# EAGLE board CT_schematic (EAGLE 7.6.0)

Size 100 x 80 mm. Coordinates in mm from the lower left corner, seen from the top.
Outline: 0,0 100,0 100,80 0,80 0,0
Copper layers (1*16): Top 0.035mm / dielectric 1.5mm / Bottom 0.035mm
Design rules "default": minimum track width 10mil, minimum drill 24mil, track to track 8mil, track to pad 8mil, pad to pad 8mil, via to via 8mil, smd to smd 8mil, copper to edge 40mil, drill to drill 8mil, minimum pad ring 10mil, minimum via ring 8mil, stop-mask expansion 4mil, vias tented up to drill 0mil, thermal gap 10mil

## Footprints (pad centres in the part's own frame; a part is rotated, then mirrored left to right if it is on the bottom)
C0603 = smd 0.8 x 0.8: 1 -0.762,0; 2 0.762,0
C0402 = smd 0.5 x 0.5: 1 -0.508,0; 2 0.508,0
C0805 = smd 1.2 x 1.3: 1 -1.016,0; 2 1.016,0
C1210 = smd 1.2 x 2.5: 1 -1.524,0; 2 1.524,0
2220 = smd 1.85 x 5.5: 1 -2.55,0; 2 2.55,0
EXV-9H = smd 3.505 x 1.676: 1 -2.857,0; 2 2.857,0
L0603 = smd 0.8 x 0.8: 1 -0.762,0; 2 0.762,0
DR1040 = smd 1.6 x 3.2: 1 -4.458,0; 2 4.458,0
PJ-037B_PACKAGE = drill 3.7 square: 1 12,0 | drill 3.2 square: 2 6,0
R0603 = smd 0.8 x 0.8: 1 -0.762,0; 2 0.762,0
LQFP100 = smd 0.3 x 1.2: 1 -6,-7.75; 2 -5.5,-7.75; 3 -5,-7.75; 4 -4.5,-7.75; 5 -4,-7.75; 6 -3.5,-7.75; 7 -3,-7.75; 8 -2.5,-7.75; 9 -2,-7.75; 10 -1.5,-7.75; 11 -1,-7.75; 12 -0.5,-7.75; 13 0,-7.75; 14 0.5,-7.75; 15 1,-7.75; 16 1.5,-7.75; 17 2,-7.75; 18 2.5,-7.75; 19 3,-7.75; 20 3.5,-7.75; 21 4,-7.75; 22 4.5,-7.75; 23 5,-7.75; 24 5.5,-7.75; 25 6,-7.75; 51 6,7.75; 52 5.5,7.75; 53 5,7.75; 54 4.5,7.75; 55 4,7.75; 56 3.5,7.75; 57 3,7.75; 58 2.5,7.75; 59 2,7.75; 60 1.5,7.75; 61 1,7.75; 62 0.5,7.75; 63 0,7.75; 64 -0.5,7.75; 65 -1,7.75; 66 -1.5,7.75; 67 -2,7.75; 68 -2.5,7.75; 69 -3,7.75; 70 -3.5,7.75; 71 -4,7.75; 72 -4.5,7.75; 73 -5,7.75; 74 -5.5,7.75; 75 -6,7.75 | smd 1.2 x 0.3: 26 7.75,-6; 27 7.75,-5.5; 28 7.75,-5; 29 7.75,-4.5; 30 7.75,-4; 31 7.75,-3.5; 32 7.75,-3; 33 7.75,-2.5; 34 7.75,-2; 35 7.75,-1.5; 36 7.75,-1; 37 7.75,-0.5; 38 7.75,0; 39 7.75,0.5; 40 7.75,1; 41 7.75,1.5; 42 7.75,2; 43 7.75,2.5; 44 7.75,3; 45 7.75,3.5; 46 7.75,4; 47 7.75,4.5; 48 7.75,5; 49 7.75,5.5; 50 7.75,6; 76 -7.75,6; 77 -7.75,5.5; 78 -7.75,5; 79 -7.75,4.5; 80 -7.75,4; 81 -7.75,3.5; 82 -7.75,3; 83 -7.75,2.5; 84 -7.75,2; 85 -7.75,1.5; 86 -7.75,1; 87 -7.75,0.5; 88 -7.75,0; 89 -7.75,-0.5; 90 -7.75,-1; 91 -7.75,-1.5; 92 -7.75,-2; 93 -7.75,-2.5; 94 -7.75,-3; 95 -7.75,-3.5; 96 -7.75,-4; 97 -7.75,-4.5; 98 -7.75,-5; 99 -7.75,-5.5; 100 -7.75,-6
ATBTLC1000-MR110CA = smd 2 x 0.5: 1 -7.2,2.7; 2 -7.2,1.8; 3 -7.2,0.9; 4 -7.2,0; 5 -7.2,-0.9; 6 -7.2,-1.8; 7 -7.2,-2.7; 8 -7.2,-3.6; 17 3.6,-3.6; 18 3.6,-2.7; 19 3.6,-1.8; 20 3.6,-0.9; 21 3.6,0; 22 3.6,0.9; 23 3.6,1.8; 24 3.6,2.7 | smd 0.5 x 2: 9 -4.255,-6.824; 10 -3.355,-6.824; 11 -2.455,-6.824; 12 -1.555,-6.824; 13 -0.655,-6.824; 14 0.245,-6.824; 15 1.145,-6.824; 16 2.045,-6.824 | smd 2.7 x 2.7: 25 -1.261,-0.328
QFN-32 = smd 0.6 x 0.3: 1 -2.3,1.75; 2 -2.3,1.25; 3 -2.3,0.75; 4 -2.3,0.25; 5 -2.3,-0.25; 6 -2.3,-0.75; 7 -2.3,-1.25; 8 -2.3,-1.75; 17 2.3,-1.75; 18 2.3,-1.25; 19 2.3,-0.75; 20 2.3,-0.25; 21 2.3,0.25; 22 2.3,0.75; 23 2.3,1.25; 24 2.3,1.75 | smd 0.3 x 0.6: 9 -1.75,-2.3; 10 -1.25,-2.3; 11 -0.75,-2.3; 12 -0.25,-2.3; 13 0.25,-2.3; 14 0.75,-2.3; 15 1.25,-2.3; 16 1.75,-2.3; 25 1.75,2.3; 26 1.25,2.3; 27 0.75,2.3; 28 0.25,2.3; 29 -0.25,2.3; 30 -0.75,2.3; 31 -1.25,2.3; 32 -1.75,2.3 | smd 3.2 x 3.2: EXP 0,0
SJ-43515TS-SMT-TR = smd 2.2 x 3: 1 0.6,-7.4; 4 3.4,-7.4 | smd 3 x 3: 2 12.8,-7.4; 5 17,-3 | smd 2 x 3: 3 5.3,0; 6 2.5,0 | drill 1.8: P$7 4.5,-3.69; P$8 11.54,-3.69
WM-64PC = drill 0.6 pad 1: 1 -1,0.95; 2 -1,-0.95
SOIC-8 = smd 1.6 x 0.6: 1 -2.7,1.905 | smd 1.55 x 0.6: 2 -2.7,0.635; 3 -2.7,-0.635; 4 -2.7,-1.905; 5 2.7,-1.905; 6 2.7,-0.635; 7 2.7,0.635; 8 2.7,1.905
182-009-MALE = drill 1.194 pad 1.524 octagon: 1 -5.537,10.923; 2 -2.769,10.923; 3 0,10.923; 4 2.769,10.923; 5 5.537,10.923; 6 -4.153,8.08; 7 -1.384,8.08; 8 1.384,8.08; 9 4.153,8.08 | hole 3.048: -12.446,9.501; 12.446,9.501
ABLS-25.000MHZ-B2F-T = smd 5.6 x 2.8: 1 -3.81,0; 2 5.69,0
ASEK = smd 1.4 x 1: 1 -1.1,-0.8; 2 1.1,-0.8; 3 1.1,0.8; 4 -1.1,0.8
ASFL1 = smd 1.7 x 1.5: 1 -1.27,-1.1; 2 1.27,-1.1; 3 1.27,1.1; 4 -1.27,1.1
IDT74FCT38072 = smd 0.51 x 1: 1 0,0; 2 1.27,0; 3 2.54,0; 4 3.81,0; 5 3.81,4.95; 6 2.54,4.95; 7 1.27,4.95; 8 0,4.95
WSON-8 = smd 0.3 x 0.6: 1 -0.75,0; 2 0.05,0; 3 0.85,0; 4 1.65,0; 5 1.65,3.8; 6 0.85,3.8; 7 0.05,3.8; 8 -0.75,3.8 | smd 3 x 2.6: PAD 0.45,1.9
QFN-16_EP = smd 0.805 x 0.3: 1 -1.452,0.75; 2 -1.452,0.25; 3 -1.452,-0.25; 4 -1.452,-0.75; 9 1.452,-0.75; 10 1.452,-0.25; 11 1.452,0.25; 12 1.452,0.75 | smd 0.3 x 0.805: 5 -0.75,-1.452; 6 -0.25,-1.452; 7 0.25,-1.452; 8 0.75,-1.452; 13 0.75,1.452; 14 0.25,1.452; 15 -0.25,1.452; 16 -0.75,1.452 | smd 1.55 x 1.55: 17 0,0
SON-6 = smd 0.55 x 0.3: 1 -0.355,0.5 | smd 0.52 x 0.3: 2 -0.37,0; 3 -0.37,-0.5; 4 0.37,-0.5; 5 0.37,0; 6 0.37,0.5
SW_4-1437565-2 = smd 1.4 x 2.1: 1 -2.23,4.55; 2 -2.23,-4.55; 3 2.23,4.55; 4 2.23,-4.55
LGM67K-G1J2-24-Z = smd 0.8 x 1.4: A -2,0; C 0,0
NC7SZ125M5X = smd 1.3 x 0.7: 1 -1.3,0.95; 2 -1.3,0; 3 -1.3,-0.95; 4 1.3,-0.95; 5 1.3,0.95
DUMMY_PACKAGE_213 = drill 0.3: 1 0,-1; 2 1.5,-1; 3 3,-1

## Placement (x,y rotation side)
C1  1e-06  [C0603]  -45.72,92.71 0 top  (outside the outline)
C2  1e-07  [C0603]  -49.53,92.71 0 top  (outside the outline)
C3  1e-07  [C0603]  -53.34,92.71 0 top  (outside the outline)
C4  1e-07  [C0603]  -57.15,92.71 0 top  (outside the outline)
C5  1e-07  [C0603]  -60.96,92.71 0 top  (outside the outline)
C6  1e-07  [C0603]  -64.77,92.71 0 top  (outside the outline)
C7  1e-07  [C0603]  -68.58,92.71 0 top  (outside the outline)
C8  4.7e-06  [C0603]  -34.29,92.71 0 top  (outside the outline)
C9  2.2e-06  [C0603]  -38.1,92.71 0 top  (outside the outline)
C10  2.2e-06  [C0603]  -41.91,92.71 0 top  (outside the outline)
C11  1e-08  [C0603]  -72.39,92.71 0 top  (outside the outline)
C12  1e-06  [C0603]  -76.2,92.71 0 top  (outside the outline)
C13  1e-11  [C0402]  -21.59,102.87 0 top  (outside the outline)
C14  1e-11  [C0402]  -25.4,102.87 0 top  (outside the outline)
C15  1e-05  [C0805]  -40.64,86.36 0 top  (outside the outline)
C16  1e-05  [C0805]  -45.72,86.36 0 top  (outside the outline)
C17  1e-06  [C0603]  -80.01,92.71 0 top  (outside the outline)
C18  1e-06  [C0603]  -83.82,92.71 0 top  (outside the outline)
C19  1e-06  [C0603]  -87.63,92.71 0 top  (outside the outline)
C20  1e-06  [C0603]  -91.44,92.71 0 top  (outside the outline)
C21  1e-06  [C0603]  -95.25,92.71 0 top  (outside the outline)
C22  1e-06  [C0603]  -99.06,92.71 0 top  (outside the outline)
C23  1e-06  [C0603]  -15.24,97.79 0 top  (outside the outline)
C24  1e-07  [C0402]  -29.21,102.87 0 top  (outside the outline)
C25  1e-07  [C0402]  -33.02,102.87 0 top  (outside the outline)
C26  1e-07  [C0402]  -36.83,102.87 0 top  (outside the outline)
C27  1e-07  [C0402]  -40.64,102.87 0 top  (outside the outline)
C28  1e-06  [C0603]  -19.05,97.79 0 top  (outside the outline)
C29  1e-06  [C0603]  -22.86,97.79 0 top  (outside the outline)
C30  1e-06  [C0603]  -26.67,97.79 0 top  (outside the outline)
C31  1e-06  [C0603]  -30.48,97.79 0 top  (outside the outline)
C32  1e-06  [C0603]  -34.29,97.79 0 top  (outside the outline)
C33  1e-06  [C0603]  -38.1,97.79 0 top  (outside the outline)
C34  1e-06  [C0603]  -41.91,97.79 0 top  (outside the outline)
C35  1e-06  [C0603]  -45.72,97.79 0 top  (outside the outline)
C36  1e-07  [C0402]  -44.45,102.87 0 top  (outside the outline)
C37  1e-07  [C0402]  -48.26,102.87 0 top  (outside the outline)
C38  1e-07  [C0402]  -52.07,102.87 0 top  (outside the outline)
C39  1e-07  [C0402]  -55.88,102.87 0 top  (outside the outline)
C40  1e-06  [C0603]  -49.53,97.79 0 top  (outside the outline)
C41  1e-07  [C0402]  -59.69,102.87 0 top  (outside the outline)
C42  1e-08  [C0402]  -63.5,102.87 0 top  (outside the outline)
C43  1e-08  [C0402]  -67.31,102.87 0 top  (outside the outline)
C44  1e-08  [C0402]  -71.12,102.87 0 top  (outside the outline)
C45  1e-08  [C0402]  -74.93,102.87 0 top  (outside the outline)
C46  1e-05  [C1210]  -29.21,86.36 0 top  (outside the outline)
C47  1e-05  [C0805]  -50.8,86.36 0 top  (outside the outline)
C48  1e-05  [C0805]  -55.88,86.36 0 top  (outside the outline)
C49  1e-06  [C0603]  -53.34,97.79 0 top  (outside the outline)
C50  1e-07  [C0402]  -78.74,102.87 0 top  (outside the outline)
C51  6.8e-05  [2220]  -45.72,68.58 0 top  (outside the outline)
C52  1e-07  [C0402]  -82.55,102.87 0 top  (outside the outline)
C53  0.0001  [EXV-9H]  -55.88,78.74 0 top  (outside the outline)
C54  0.0001  [EXV-9H]  -67.31,78.74 0 top  (outside the outline)
C55  1e-08  [C0402]  -86.36,102.87 0 top  (outside the outline)
F1  240.0  [L0603]  -57.15,97.79 0 top  (outside the outline)
I1  3.8e-06  [DR1040]  -54.61,55.88 0 top  (outside the outline)
J1  PJ-037B  [PJ-037B_PACKAGE]  -27.94,57.15 0 top  (outside the outline)
R2  1000.0  [R0603]  -60.96,97.79 0 top  (outside the outline)
R4  4700.0  [R0603]  -64.77,97.79 0 top  (outside the outline)
R5  10000.0  [R0603]  -86.36,86.36 0 top  (outside the outline)
R6  10000.0  [R0603]  -91.44,86.36 0 top  (outside the outline)
R7  10000.0  [R0603]  -96.52,86.36 0 top  (outside the outline)
R8  1270.0  [R0603]  -68.58,97.79 0 top  (outside the outline)
R9  1270.0  [R0603]  -72.39,97.79 0 top  (outside the outline)
R10  1270.0  [R0603]  -76.2,97.79 0 top  (outside the outline)
R11  1270.0  [R0603]  -80.01,97.79 0 top  (outside the outline)
R12  120.0  [R0603]  -83.82,97.79 0 top  (outside the outline)
R13  100000.0  [R0603]  -60.96,86.36 0 top  (outside the outline)
R14  100000.0  [R0603]  -66.04,86.36 0 top  (outside the outline)
R15  200.0  [R0603]  -87.63,97.79 0 top  (outside the outline)
R16  1000.0  [R0603]  -91.44,97.79 0 top  (outside the outline)
R17  20000.0  [R0603]  -15.24,92.71 0 top  (outside the outline)
R18  91000.0  [R0603]  -20.32,92.71 0 top  (outside the outline)
R19  300000.0  [R0603]  -71.12,86.36 0 top  (outside the outline)
R20  10000.0  [R0603]  -25.4,92.71 0 top  (outside the outline)
R21  10000.0  [R0603]  -30.48,92.71 0 top  (outside the outline)
R22  9100.0  [R0603]  -95.25,97.79 0 top  (outside the outline)
R23  680000.0  [R0603]  -76.2,86.36 0 top  (outside the outline)
R24  120000.0  [R0603]  -81.28,86.36 0 top  (outside the outline)
U1  STM32F765VIT6  [LQFP100]  -85.09,8.89 0 top  (outside the outline)
U2  ATBTLC1000-MR110CA  [ATBTLC1000-MR110CA]  -57.15,8.89 0 top  (outside the outline)
U3  SGTL5000XNAA3  [QFN-32]  -91.44,55.88 0 top  (outside the outline)
U4  SJ-43515TS-SMT-TR  [SJ-43515TS-SMT-TR]  -39.37,31.75 0 top  (outside the outline)
U5  SJ-43515TS-SMT-TR  [SJ-43515TS-SMT-TR]  -67.31,31.75 0 top  (outside the outline)
U6  SJ-43515TS-SMT-TR  [SJ-43515TS-SMT-TR]  -95.25,31.75 0 top  (outside the outline)
U7  WM-64PCT  [WM-64PC]  -67.31,55.88 0 top  (outside the outline)
U8  SGTL5000XNAA3  [QFN-32]  -22.86,69.85 0 top  (outside the outline)
U9  SJ-43515TS-SMT-TR  [SJ-43515TS-SMT-TR]  -39.37,45.72 0 top  (outside the outline)
U10  SJ-43515TS-SMT-TR  [SJ-43515TS-SMT-TR]  -67.31,45.72 0 top  (outside the outline)
U11  SJ-43515TS-SMT-TR  [SJ-43515TS-SMT-TR]  -95.25,45.72 0 top  (outside the outline)
U12  WM-64PCT  [WM-64PC]  -77.47,55.88 0 top  (outside the outline)
U13  SN65HVD230D  [SOIC-8]  -36.83,68.58 0 top  (outside the outline)
U14  182-009-113R531  [182-009-MALE]  -36.83,6.35 0 top  (outside the outline)
U15  ABLS-25.000MHZ-B2F-T  [ABLS-25.000MHZ-B2F-T]  -86.36,78.74 0 top  (outside the outline)
U16  ASEK-32.768KHz-ECST  [ASEK]  -46.99,78.74 0 top  (outside the outline)
U17  ASFL-24.57MHZ-NCS  [ASFL1]  -85.09,68.58 0 top  (outside the outline)
U18  idt74fct38072  [IDT74FCT38072]  -29.21,76.2 0 top  (outside the outline)
U19  LP3878SDX-ADJ/NOPB  [WSON-8]  -67.31,67.31 0 top  (outside the outline)
U20  LTC3601EUD#PBF  [QFN-16_EP]  -15.24,102.87 0 top  (outside the outline)
U21  TPS3895ADRYR  [SON-6]  -95.25,101.6 0 top  (outside the outline)
U22  4-1437565-2  [SW_4-1437565-2]  -44.45,57.15 0 top  (outside the outline)
U23  Q65110A2395  [LGM67K-G1J2-24-Z]  -17.78,86.36 0 top  (outside the outline)
U24  nc7sz125m5x  [NC7SZ125M5X]  -34.29,85.09 0 top  (outside the outline)
U25  Dummy  [DUMMY_PACKAGE_213]  -92.71,102.87 0 top  (outside the outline)

## Library data of the parts
C1-C55 F1 I1 J1 R2 R4-R24 U1-U25 = circuit_tree

## Nets
CLK_CRYSTAL_U1_12: C13.1 U1.12 U15.1
CLK_CRYSTAL_U1_13: C14.1 U1.13 U15.2
CLK_U1_8: U1.8 U16.3
CLK_U3_21: U3.21 U18.7
CLK_U8_21: U8.21 U18.6
CLK_U18_3: U17.3 U18.3
GND: C1.2 C2.2 C3.2 C4.2 C5.2 C6.2 C7.2 C8.2 C9.2 C10.2 C11.2 C12.2 C13.2 C14.2 C15.2 C16.2 C24.2 C25.2 C26.2 C27.2 C28.2 C36.2 C37.2 C38.2 C39.2 C40.2 C41.2 C42.2 C43.2 C44.2 C45.2 C46.2 C47.2 C48.2 C49.2 C51.1 C51.2 C52.2 C53.2 C54.2 C55.2 J1.2 R2.2 R5.2 R9.2 R11.2 R13.2 R16.2 R17.2 R19.2 R22.2 R24.2 U1.10 U1.19 U1.26 U1.49 U1.74 U1.99 U2.1 U2.9 U2.13 U2.24 U2.25 U3.1 U3.3 U3.7 U3.EXP U5.1 U6.1 U7.2 U8.1 U8.3 U8.7 U8.EXP U10.1 U11.1 U12.2 U13.2 U14.5 U16.2 U17.2 U18.4 U18.5 U18.8 U19.3 U19.PAD U20.1 U20.9 U20.17 U21.2 U23.C U24.1 U24.3 U25.1
NET_U1_14: R4.1 U1.14 U24.4
NET_U1_21: C11.1 C12.1 F1.1 U1.20 U1.21
NET_U1_48: C9.1 U1.48
NET_U1_73: C10.1 U1.73
NET_U1_94: R5.1 U1.94
NET_U1_97: U23.A
NET_U1_98: U22.3 U22.4
NET_U2_17: R6.1 U2.17
NET_U2_20: R7.1 U2.20
NET_U3_10: C27.1 U3.10
NET_U3_29: R8.1 U3.29
NET_U3_31: R9.1 U3.31
NET_U4_1: U3.4 U4.1
NET_U4_2: U3.2 U4.2
NET_U4_5: U3.6 U4.5
NET_U5_2: C18.1 U5.2
NET_U5_5: C17.1 U5.5
NET_U5_11: C18.2
NET_U5_12: C17.2
NET_U6_2: C20.1 C21.1 U6.2
NET_U6_5: C19.1 U6.5
NET_U6_13: C20.2 C21.2
NET_U6_14: C19.2
NET_U7_1: C22.1 C23.1 C28.1 U3.16 U7.1
NET_U7_15: C22.2 C23.2
NET_U8_10: C39.1 U8.10
NET_U8_29: R10.1 U8.29
NET_U8_31: R11.1 U8.31
NET_U9_1: U8.4 U9.1
NET_U9_2: U8.2 U9.2
NET_U9_5: U8.6 U9.5
NET_U10_2: C30.1 U10.2
NET_U10_5: C29.1 U10.5
NET_U10_11: C30.2
NET_U10_12: C29.2
NET_U11_2: C32.1 C33.1 U11.2
NET_U11_5: C31.1 U11.5
NET_U11_13: C32.2 C33.2
NET_U11_14: C31.2
NET_U12_1: C34.1 C35.1 C40.1 U8.16 U12.1
NET_U12_15: C34.2 C35.2
NET_U13_6: R12.2 U13.6
NET_U13_8: R13.1 U13.8
NET_U14_2: R12.2 U13.6 U14.2
NET_U14_3: R12.1 U13.7 U14.3
NET_U19_1: C45.1 U19.1
NET_U19_6: R15.2 R16.1 U19.6
NET_U19_8: R14.1 U19.8
NET_U20_3: C50.2 I1.1 U20.3 U20.4
NET_U20_6: C50.1 U20.6
NET_U20_7: C49.1 U20.7 U20.12
NET_U20_10: R19.1 U20.10
NET_U20_11: R17.1 R18.1 U20.11
NET_U20_14: U20.14
NET_U20_ATNET_3: I1.2 R18.2
NET_U21_1: R21.1 R22.1 U21.1
NET_U21_3: R23.2 R24.1 U21.3
NET_U21_4: R20.1 U21.4 U24.2
NET_U22_1: R2.1 U22.1 U22.2
PROC_ADC1_IN3: U1.25 U25.2
PROC_ADC1_IN12: U1.17 U25.3
PROC_CAN1_RX: U1.70 U13.4
PROC_CAN1_TX: U1.71 U13.1
PROC_I2S1_CK: U1.29 U3.24
PROC_I2S1_SD: U1.31 U3.26
PROC_I2S1_WS: U1.28 U3.23
PROC_I2S2_CK: U1.46 U8.24
PROC_I2S2_SD: U1.16 U8.26
PROC_I2S2_WS: U1.51 U8.23
PROC_SPI1_MISO: U1.30 U2.14
PROC_SPI1_MOSI: U1.88 U2.11
PROC_SPI1_NSS: U1.77 U2.12
PROC_SPI1_SCK: U1.89 U2.10
VCC_S1_11V4: C46.1 C48.1 C53.1 C54.1 J1.1 R14.2 U19.4 U20.15 U20.16
VCC_TIER1_1V2: C24.1 C36.1 C47.1 R15.1 U3.30 U8.30 U19.5
VCC_TIER1_3V3: C1.1 C2.1 C3.1 C4.1 C5.1 C6.1 C7.1 C8.1 C15.1 C16.1 C25.1 C26.1 C37.1 C38.1 C41.1 C42.1 C43.1 C44.1 C51.2 C52.1 C55.1 F1.2 I1.2 R4.2 R6.2 R7.2 R8.2 R10.2 R18.2 R20.2 R21.2 R23.1 U1.6 U1.11 U1.27 U1.50 U1.75 U1.100 U2.6 U2.22 U3.5 U3.20 U8.5 U8.20 U13.3 U16.4 U17.4 U18.1 U18.2 U20.8 U21.6 U24.5

## Tracks (layer width: path | path; a pad name or v marks a point on that pad's centre or on a via)
CLK_CRYSTAL_U1_12  (2 unrouted)
CLK_CRYSTAL_U1_13  (2 unrouted)
CLK_U1_8  (1 unrouted)
CLK_U3_21  (1 unrouted)
CLK_U8_21  (1 unrouted)
CLK_U18_3  (1 unrouted)
GND  (93 unrouted)
NET_U1_14  (2 unrouted)
NET_U1_21  (4 unrouted)
NET_U1_48  (1 unrouted)
NET_U1_73  (1 unrouted)
NET_U1_94  (1 unrouted)
NET_U1_98  (1 unrouted)
NET_U2_17  (1 unrouted)
NET_U2_20  (1 unrouted)
NET_U3_10  (1 unrouted)
NET_U3_29  (1 unrouted)
NET_U3_31  (1 unrouted)
NET_U4_1  (1 unrouted)
NET_U4_2  (1 unrouted)
NET_U4_5  (1 unrouted)
NET_U5_2  (1 unrouted)
NET_U5_5  (1 unrouted)
NET_U6_2  (2 unrouted)
NET_U6_5  (1 unrouted)
NET_U6_13  (1 unrouted)
NET_U7_1  (4 unrouted)
NET_U7_15  (1 unrouted)
NET_U8_10  (1 unrouted)
NET_U8_29  (1 unrouted)
NET_U8_31  (1 unrouted)
NET_U9_1  (1 unrouted)
NET_U9_2  (1 unrouted)
NET_U9_5  (1 unrouted)
NET_U10_2  (1 unrouted)
NET_U10_5  (1 unrouted)
NET_U11_2  (2 unrouted)
NET_U11_5  (1 unrouted)
NET_U11_13  (1 unrouted)
NET_U12_1  (4 unrouted)
NET_U12_15  (1 unrouted)
NET_U13_6  (1 unrouted)
NET_U13_8  (1 unrouted)
NET_U14_2  (2 unrouted)
NET_U14_3  (2 unrouted)
NET_U19_1  (1 unrouted)
NET_U19_6  (2 unrouted)
NET_U19_8  (1 unrouted)
NET_U20_3  (3 unrouted)
NET_U20_6  (1 unrouted)
NET_U20_7  (2 unrouted)
NET_U20_10  (1 unrouted)
NET_U20_11  (2 unrouted)
NET_U20_ATNET_3  (1 unrouted)
NET_U21_1  (2 unrouted)
NET_U21_3  (2 unrouted)
NET_U21_4  (2 unrouted)
NET_U22_1  (2 unrouted)
PROC_ADC1_IN3  (1 unrouted)
PROC_ADC1_IN12  (1 unrouted)
PROC_CAN1_RX  (1 unrouted)
PROC_CAN1_TX  (1 unrouted)
PROC_I2S1_CK  (1 unrouted)
PROC_I2S1_SD  (1 unrouted)
PROC_I2S1_WS  (1 unrouted)
PROC_I2S2_CK  (1 unrouted)
PROC_I2S2_SD  (1 unrouted)
PROC_I2S2_WS  (1 unrouted)
PROC_SPI1_MISO  (1 unrouted)
PROC_SPI1_MOSI  (1 unrouted)
PROC_SPI1_NSS  (1 unrouted)
PROC_SPI1_SCK  (1 unrouted)
VCC_S1_11V4  (8 unrouted)
VCC_TIER1_1V2  (6 unrouted)
VCC_TIER1_3V3  (51 unrouted)